# Altium PCB PCB1.PcbDoc
Units mm, origin at the board's own origin, x right, y up, seen from the top; angles counter-clockwise.
Board outline 55 x 39 mm, 2 copper layers (Top Layer, Bottom Layer); 16 components, 13 nets, 48 pads, 2 vias.
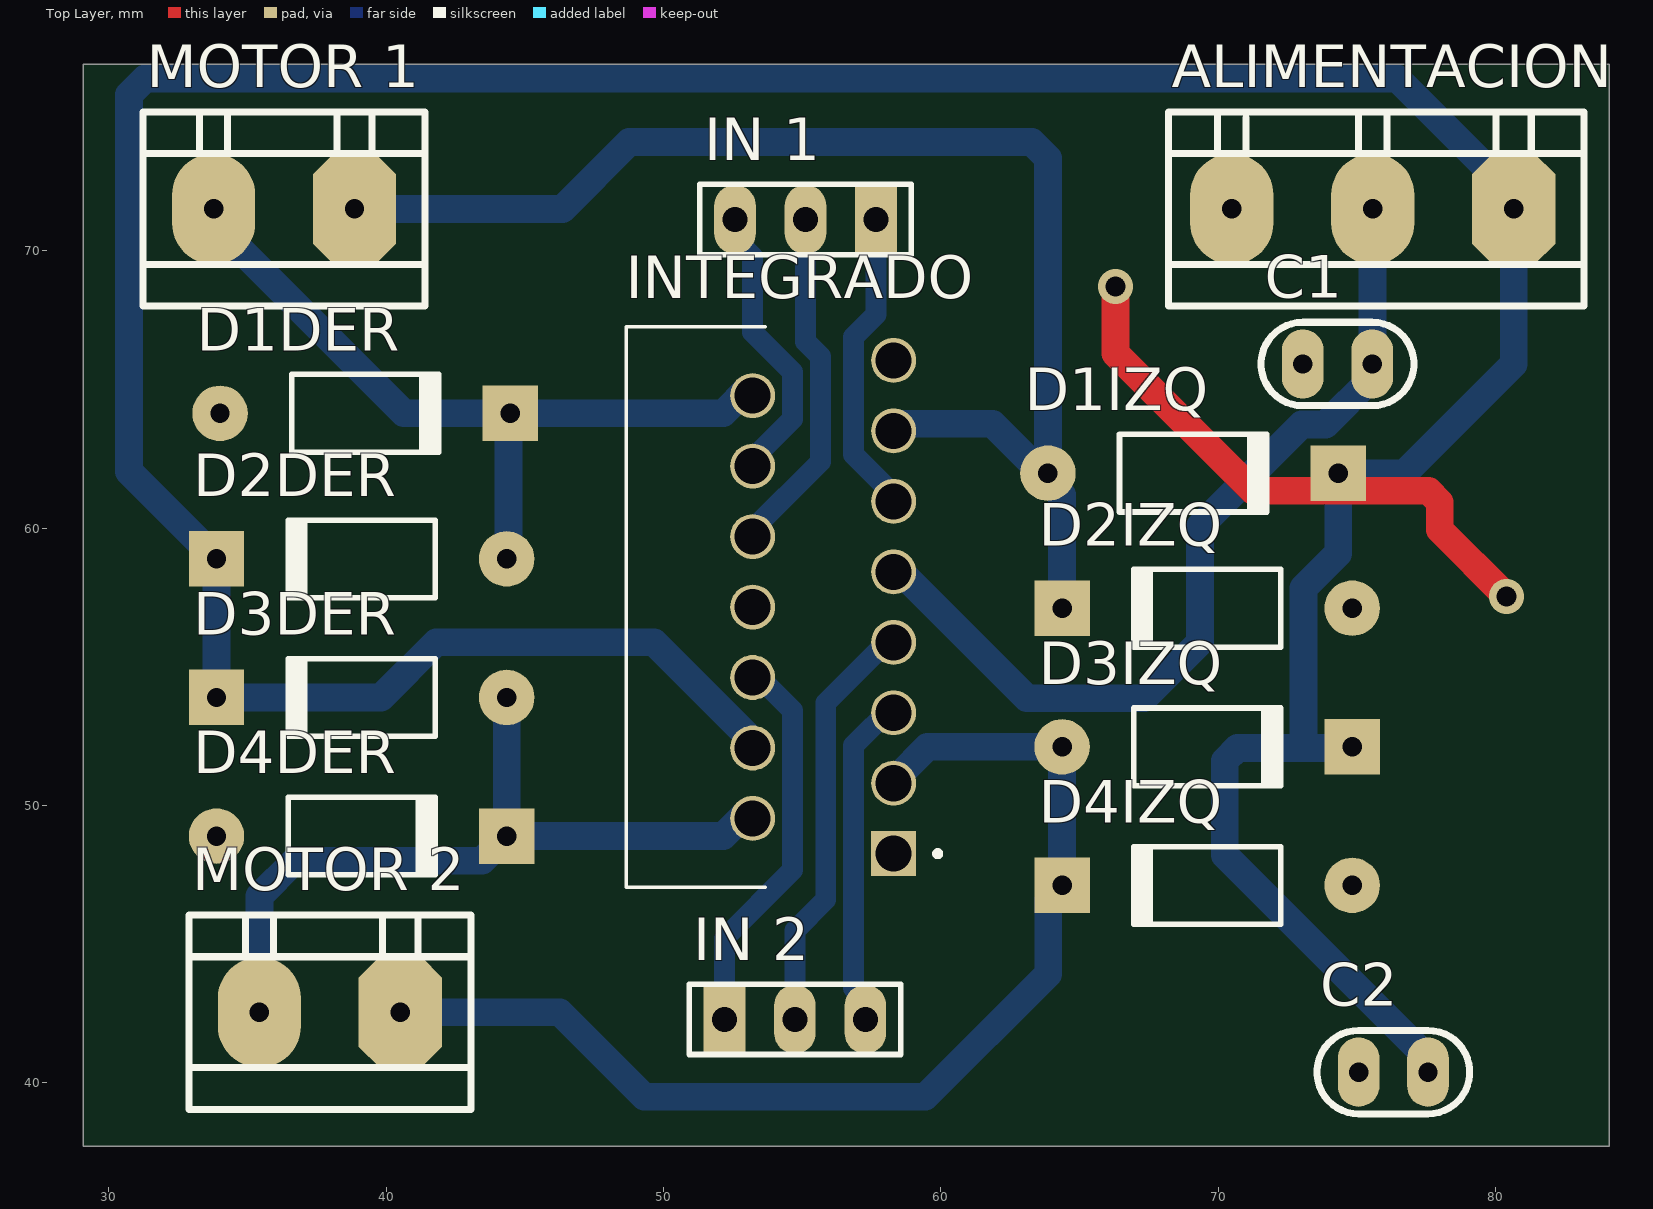
[diagram p0: Top Layer view]
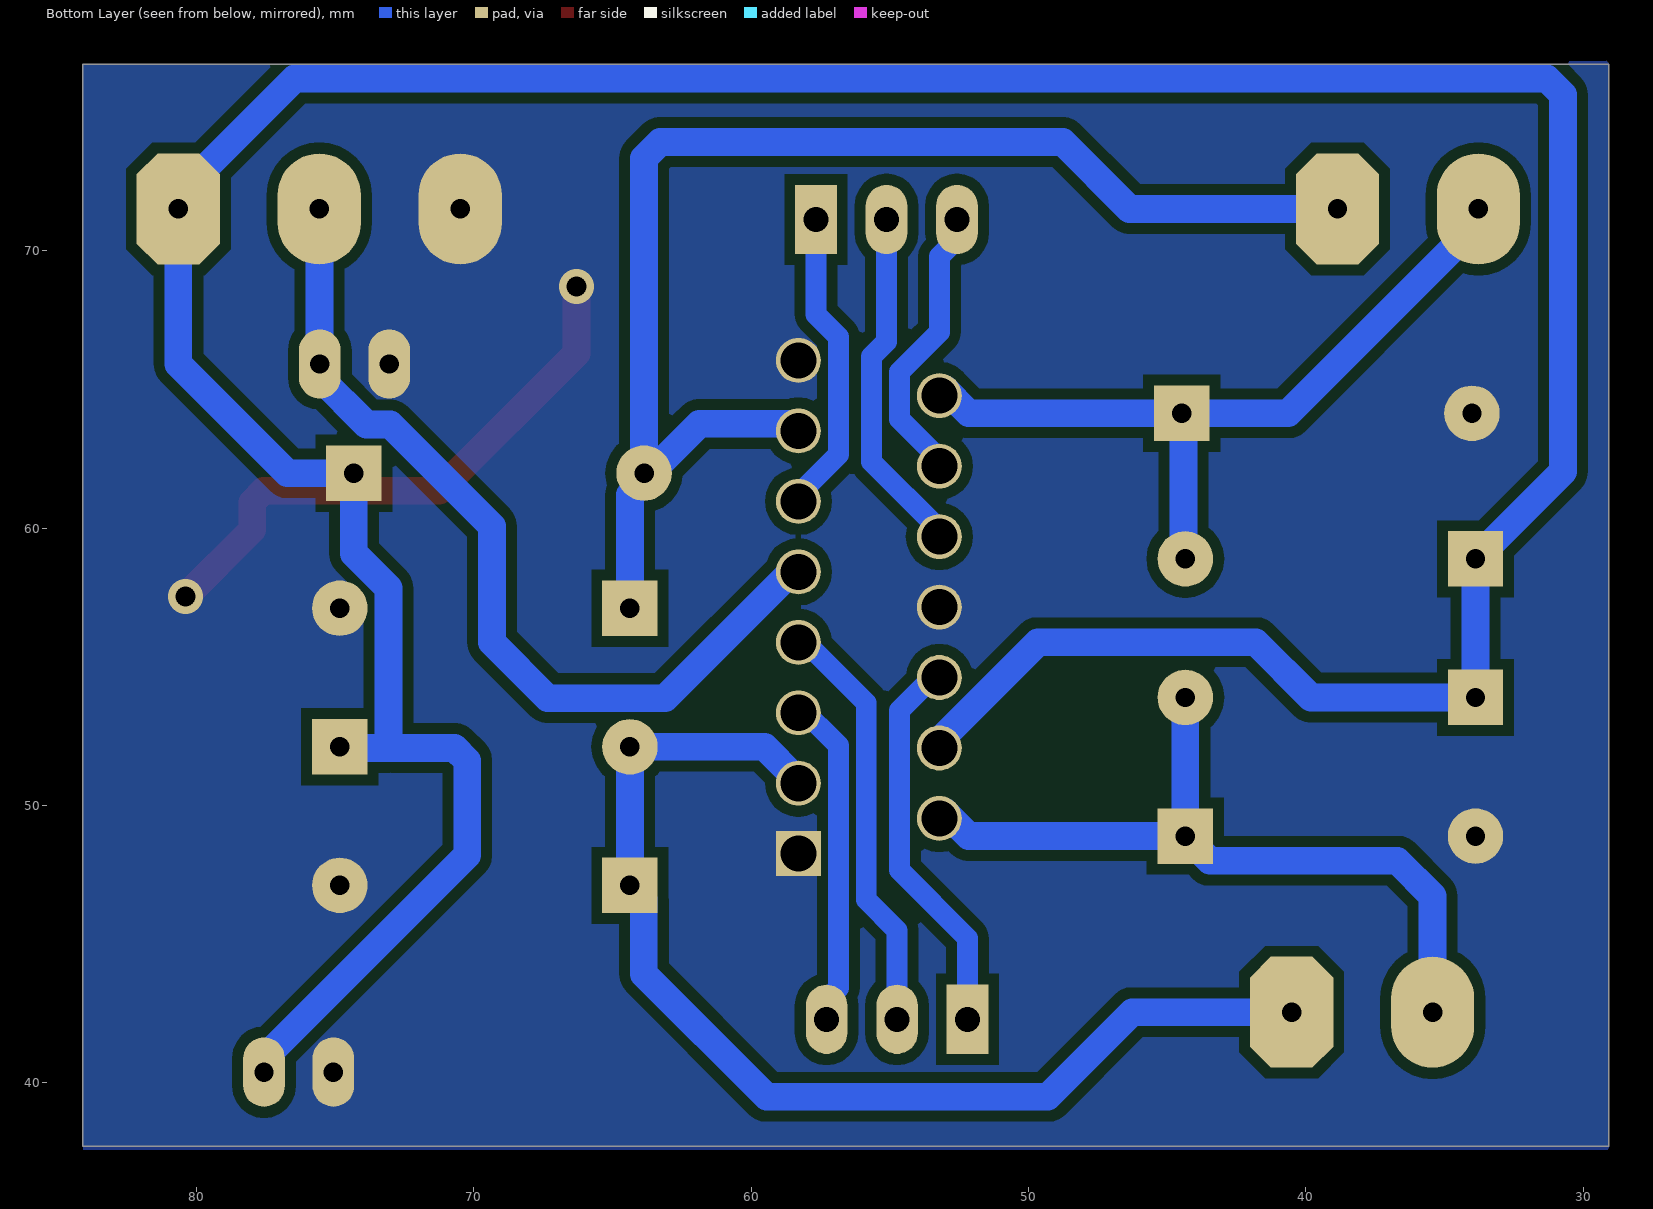
[diagram p1: Bottom Layer view, seen from below]

## Layer stack, top to bottom
Top Solder: solder mask 0.0102, Solder Resist, Dk 3.5
Top Layer: signal copper 0.0356
Dielectric 1: dielectric 0.32, FR-4, Dk 4.8
Bottom Layer: signal copper 0.0356
Bottom Solder: solder mask 0.0102, Solder Resist, Dk 3.5

## Board outline
29.083,37.719 84.083,37.719 84.083,76.719 29.083,76.719

## Design rules (kind name [scope] priority, off if disabled: settings)
Clearance [All] p1: gap=0.4 ignorepadtopadclearanceinfootprint=FALSE
PlaneClearance [All] p1: clearance=0.8
PlaneConnect [All] p1: planeconnectstyle=Direct reliefexpansion=0.508 reliefentries=4 reliefconductorwidth=0.254 reliefairgap=0.254
PolygonConnect [All] p1: connectstyle=Direct reliefconductorwidth=0.5 reliefentries=4 polygonreliefangle="90 Angle" airgapwidth=0.254
RoutingVias [All] p1: holewidth=0.711 width=1.27 viastyle="Through Hole" minholewidth=0.711 minwidth=1.27 maxholewidth=0.711 maxwidth=1.27
SolderMaskExpansion [All] p1: expansion=0.102 istentingtop=FALSE
Width [All] p1: maxlimit=1 minlimit=0.75 preferedwidth=1
28 further rules are at their usual default settings.

## Classes and differential pairs
component class Sheet1: ALIMENTACION C1 C2 D1DER D1IZQ D2DER D2IZQ D3DER D3IZQ D4DER D4IZQ "IN 2" "MOTOR 1" "MOTOR 2" U?

## Components (designator, comment, footprint, x,y, rotation, side; value= is the part's Value field where it differs from the comment)
ALIMENTACION "Bornera 3P" "Bornera 3P" 75.565,71.501 r180 top
C1 "Cap" Capacitor 74.295,65.913 r180 top value=100pF
C2 "Cap" Capacitor 76.307,40.386 r0 top value=100pF
D1DER "Diode 1N4007" "Axial diodo" 39.243,64.135 r0 top
D1IZQ "Diode 1N4007" "Axial diodo" 69.088,61.976 r0 top
D2DER "Diode 1N4007" "Axial diodo" 39.116,58.886 r180 top
D2IZQ "Diode 1N4007" "Axial diodo" 69.596,57.108 r180 top
D3DER "Diode 1N4007" "Axial diodo" 39.116,53.89 r180 top
D3IZQ "Diode 1N4007" "Axial diodo" 69.596,52.112 r0 top
D4DER "Diode 1N4007" "Axial diodo" 39.116,48.895 r0 top
D4IZQ "Diode 1N4007" "Axial diodo" 69.596,47.117 r180 top
"IN 1" "Header 3" HDR1X3 57.658,71.12 r180 top
"IN 2" "Header 3" HDR1X3 52.197,42.291 r0 top
INTEGRADO "L298N" l298n 58.293,48.26 r180 top
"MOTOR 1" "RADIAL-2.54X11" "Bornera 2P" 36.322,71.501 r180 top
"MOTOR 2" "RADIAL-2.54X11" "Bornera 2P" 37.973,42.545 r180 top

## Footprints (in the part's own frame and the unit in brackets; to place one, negate y for a bottom-side part, rotate by r counter-clockwise, add the part's x,y. Pads: shape width x height; smd on the part's side, far side on the other; paste and mask are expansions set on the pad)
"Axial diodo" [mm] "Diode, Axial; Body 5.2 x 2.7 mm (LxDia. max), Lead Dia. 0.86 mm (max)"
  round 2 hole 0.7: 1(-5.23,0)
  rect 2x2 hole 0.7: 2(5.23,0)
  silkscreen extent -2.65,-1.4 2.75,1.4
"Bornera 2P" [mm] "Connector; Header; 2 Position"
  oct 3x4 hole 0.7: 1(-2.54,0)
  oval 3x4 hole 0.7: 2(2.54,0)
  silkscreen extent -5.08,-3.5 5.08,3.5
"Bornera 3P" [mm] "Connector; Header; 2 Position"
  oct 3x4 hole 0.7: 1(-5.08,0)
  oval 3x4 hole 0.7: 2(0,0) 3(5.08,0)
  silkscreen extent -7.62,-3.5 7.37,3.5
Capacitor [mm] "Polarized Capacitor (Radial); 2 Leads"
  oval 1.5x2.5 hole 0.7: 1(1.25,0) 2(-1.25,0)
  silkscreen extent -2.75,-1.5 2.75,1.5
HDR1X3 [mm] "Connector; Header; 3 Position"
  rect 1.5x2.5 hole 0.9: 1(0,0)
  oval 1.5x2.5 hole 0.9: 2(2.54,0) 3(5.08,0)
  silkscreen extent -1.27,-1.27 6.35,1.27
l298n [mm]
  rect 1.62x1.62 hole 1.3: 1(0,0)
  round 1.62 hole 1.3: 2(5.08,-1.27) 3(0,-2.54) 4(5.08,-3.81) 5(0,-5.08) 6(5.08,-6.35) 7(0,-7.62) 8(5.08,-8.89) 9(0,-10.16) 10(5.08,-11.43) 11(0,-12.7) 12(5.08,-13.97) 13(0,-15.24) 14(5.08,-16.51) 15(0,-17.78)
  silkscreen extent -1.69,-18.99 9.63,1.21

## Part data
C1 C2: "Capacitor", LatestRevisionDate=17-Jul-2002, LatestRevisionNote="Re-released for DXP Platform.", PackageDescription="Radial Cap, Thru-Hole; 2 Leads; 0.3 in Pin Spacing", PackageReference=RAD-0.3, Published=8-Jun-2000, Publisher="Altium Limited"
D1DER D1IZQ D2DER D2IZQ D3DER D3IZQ D4DER D4IZQ: "1 Amp General Purpose Rectifier", Code_JEDEC=DO-204-AL, ComponentLink1Description="Manufacturer Link", ComponentLink1URL=http://www.fairchildsemi.com/, ComponentLink2Description=Datasheet, ComponentLink2URL=http://www.fairchildsemi.com/ds/1N%2F1N4001.pdf, DatasheetVersion=1998, LatestRevisionDate=17-Jul-2002, LatestRevisionNote="Re-released for DXP Platform.", PackageDescription="Diode, Axial; Body 5.2 x 2.7 mm (LxDia. max), Lead Dia. 0.86 mm (max)", PackageReference=DO-41, PackageVersion=Aug-1999, Published=8-Jun-2000, Publisher="Altium Limited"
"IN 1" "IN 2": "Header, 3-Pin", LatestRevisionDate=17-Jul-2002, LatestRevisionNote="Re-released for DXP Platform.", Publisher="Altium Limited"
INTEGRADO: "Dual Full Bridge Motor Driver 15-Pin(15+Tab) MULTIWATT V Tube", Package=None, Availability=Unavailable, MP=L298N, Price=None
"MOTOR 1" "MOTOR 2": library part "Bornera 2P", LatestRevisionDate=17-Jul-2002, LatestRevisionNote="Re-released for DXP Platform.", Publisher="Altium Limited"
ALIMENTACION: LatestRevisionDate=17-Jul-2002, LatestRevisionNote="Re-released for DXP Platform.", Publisher="Altium Limited"

## Via types
v1: diameter 1.27, hole 0.711, Top Layer to Bottom Layer, 2 vias

## Nets (pads, with @x,y where several pads share a name; then routed paths per layer and width w, separated by ;. In a path a pad name is that pad's centre, name@x,y a point inside that pad or via, vN(x,y) a via of type N, cw(c..) or ccw(c..) an arc to the next point about the centre after c; other vN are vias at no path point)
GND: ALIMENTACION.3 C1.1 C2.2 D1DER.1 D2IZQ.1 D4DER.1 D4IZQ.1 INTEGRADO.1 INTEGRADO.8 INTEGRADO.15 | length 20.7
  Top Layer w1: v1(66.294,68.707) 66.294,66.294 71.247,61.341 77.575,61.341 77.985,60.931 77.985,59.937 v1(80.391,57.531)
NetALIMENTACION_1: ALIMENTACION.1 C2.1 D1IZQ.2 D2DER.2 D3DER.2 D3IZQ.2 INTEGRADO.4 | length 139.9
  Bottom Layer w1: INTEGRADO.4@53.213,52.324 49.657,55.88 41.81,55.88 39.82,53.89 D3DER.2 D2DER.2 30.734,62.038 30.734,75.614 31.32,76.2 76.446,76.2 80.645,72.001 ALIMENTACION.1 80.645,65.913 76.708,61.976 D1IZQ.2 74.318,59.08 73.072,57.834 73.072,52.07 74.784,52.07 D3IZQ.2 ; 72.926,52.07 70.69,52.07 70.231,51.611 70.231,48.212 77.557,40.886 C2.1
NetALIMENTACION_2: ALIMENTACION.2 C1.2 INTEGRADO.9 | length 32.6
  Bottom Layer w1: INTEGRADO.9@58.293,58.674 63.101,53.866 67.328,53.866 69.342,55.88 69.342,60.066 73.006,63.73 73.862,63.73 75.545,65.413 C1.2 75.555,65.923 75.555,71.491 ALIMENTACION.2
NetD1DER_2: "MOTOR 1.2" D1DER.2 D2DER.1 INTEGRADO.14 | length 28.4
  Bottom Layer w1: 33.782,71.501 33.782,71.001 40.648,64.135 D1DER.2 ; D2DER.1 44.41,58.949 44.41,64.072 D1DER.2 ; INTEGRADO.14@53.213,65.024 53.045,65.024 52.156,64.135 D1DER.2
NetD1IZQ_1: "MOTOR 1.1" D1IZQ.1 D2IZQ.2 INTEGRADO.13 | length 49
  Bottom Layer w1: 38.862,71.501 46.355,71.501 48.768,73.914 63.272,73.914 63.858,73.328 D1IZQ.1 ; INTEGRADO.13@58.293,63.754 61.863,63.754 63.641,61.976 D1IZQ.1 ; D2IZQ.2 64.366,61.197 63.858,61.705 D1IZQ.1
NetD3DER_1: "MOTOR 2.2" D3DER.1 D4DER.2 INTEGRADO.2 | length 28.2
  Bottom Layer w1: 35.433,42.545 35.433,46.736 36.703,48.006 43.457,48.006 D4DER.2 ; D3DER.1 D4DER.2 ; INTEGRADO.2@53.213,49.784 53.045,49.784 52.156,48.895 D4DER.2
NetD3IZQ_1: "MOTOR 2.1" D3IZQ.1 D4IZQ.2 INTEGRADO.3 | length 41.4
  Bottom Layer w1: 40.513,42.545 46.257,42.545 49.305,39.497 59.436,39.497 63.866,43.927 63.866,46.617 D4IZQ.2 D3IZQ.1 59.519,52.112 58.461,51.054 INTEGRADO.3@58.293,51.054
"NetIN 1_1": "IN 1.1" INTEGRADO.11 | length 10.8
  Bottom Layer w0.75: 57.658,71.12 57.658,67.694 56.854,66.89 56.854,62.653 INTEGRADO.11@58.293,61.214
"NetIN 1_2": "IN 1.2" INTEGRADO.10 | length 12.4
  Bottom Layer w0.75: INTEGRADO.10@53.213,59.944 55.656,62.387 55.656,66.179 55.118,66.717 55.118,71.12
"NetIN 1_3": "IN 1.3" INTEGRADO.12 | length 10.1
  Bottom Layer w0.75: 52.578,71.12 52.578,70.417 53.213,69.782 53.213,67.059 54.652,65.62 54.652,63.923 INTEGRADO.12@53.213,62.484
"NetIN 2_1": "IN 2.1" INTEGRADO.6 | length 14.2
  Bottom Layer w0.75: 52.197,42.291 52.197,45.212 54.652,47.667 54.652,53.425 INTEGRADO.6@53.213,54.864
"NetIN 2_2": "IN 2.2" INTEGRADO.7 | length 15.3
  Bottom Layer w0.75: 54.737,42.291 54.737,45.495 55.85,46.608 55.85,53.691 INTEGRADO.7@58.293,56.134
"NetIN 2_3": "IN 2.3" INTEGRADO.5 | length 12.1
  Bottom Layer w0.75: 57.277,42.291 57.277,42.994 56.854,43.417 56.854,52.155 INTEGRADO.5@58.293,53.594

## Polygon pours and split planes (outlines as drawn)
GND on Bottom Layer "GND_L02_P000" (solid, remove dead copper, pour order 0): 84.074,76.708 84.074,37.592 28.956,37.592 29.083,37.719 29.083,76.835